# Altium PCB Circular PCB.PcbDoc (part 3 of 4)
Units mm, origin at the board's own origin, x right, y up, seen from the top; angles counter-clockwise.
Board outline 100 x 100 mm, 6 copper layers (Top Layer, GND (Top), X, Y, GND (Bot), Bottom Layer), stack 1.599 mm thick; 185 components, 119 nets, 581 pads, 159 vias.
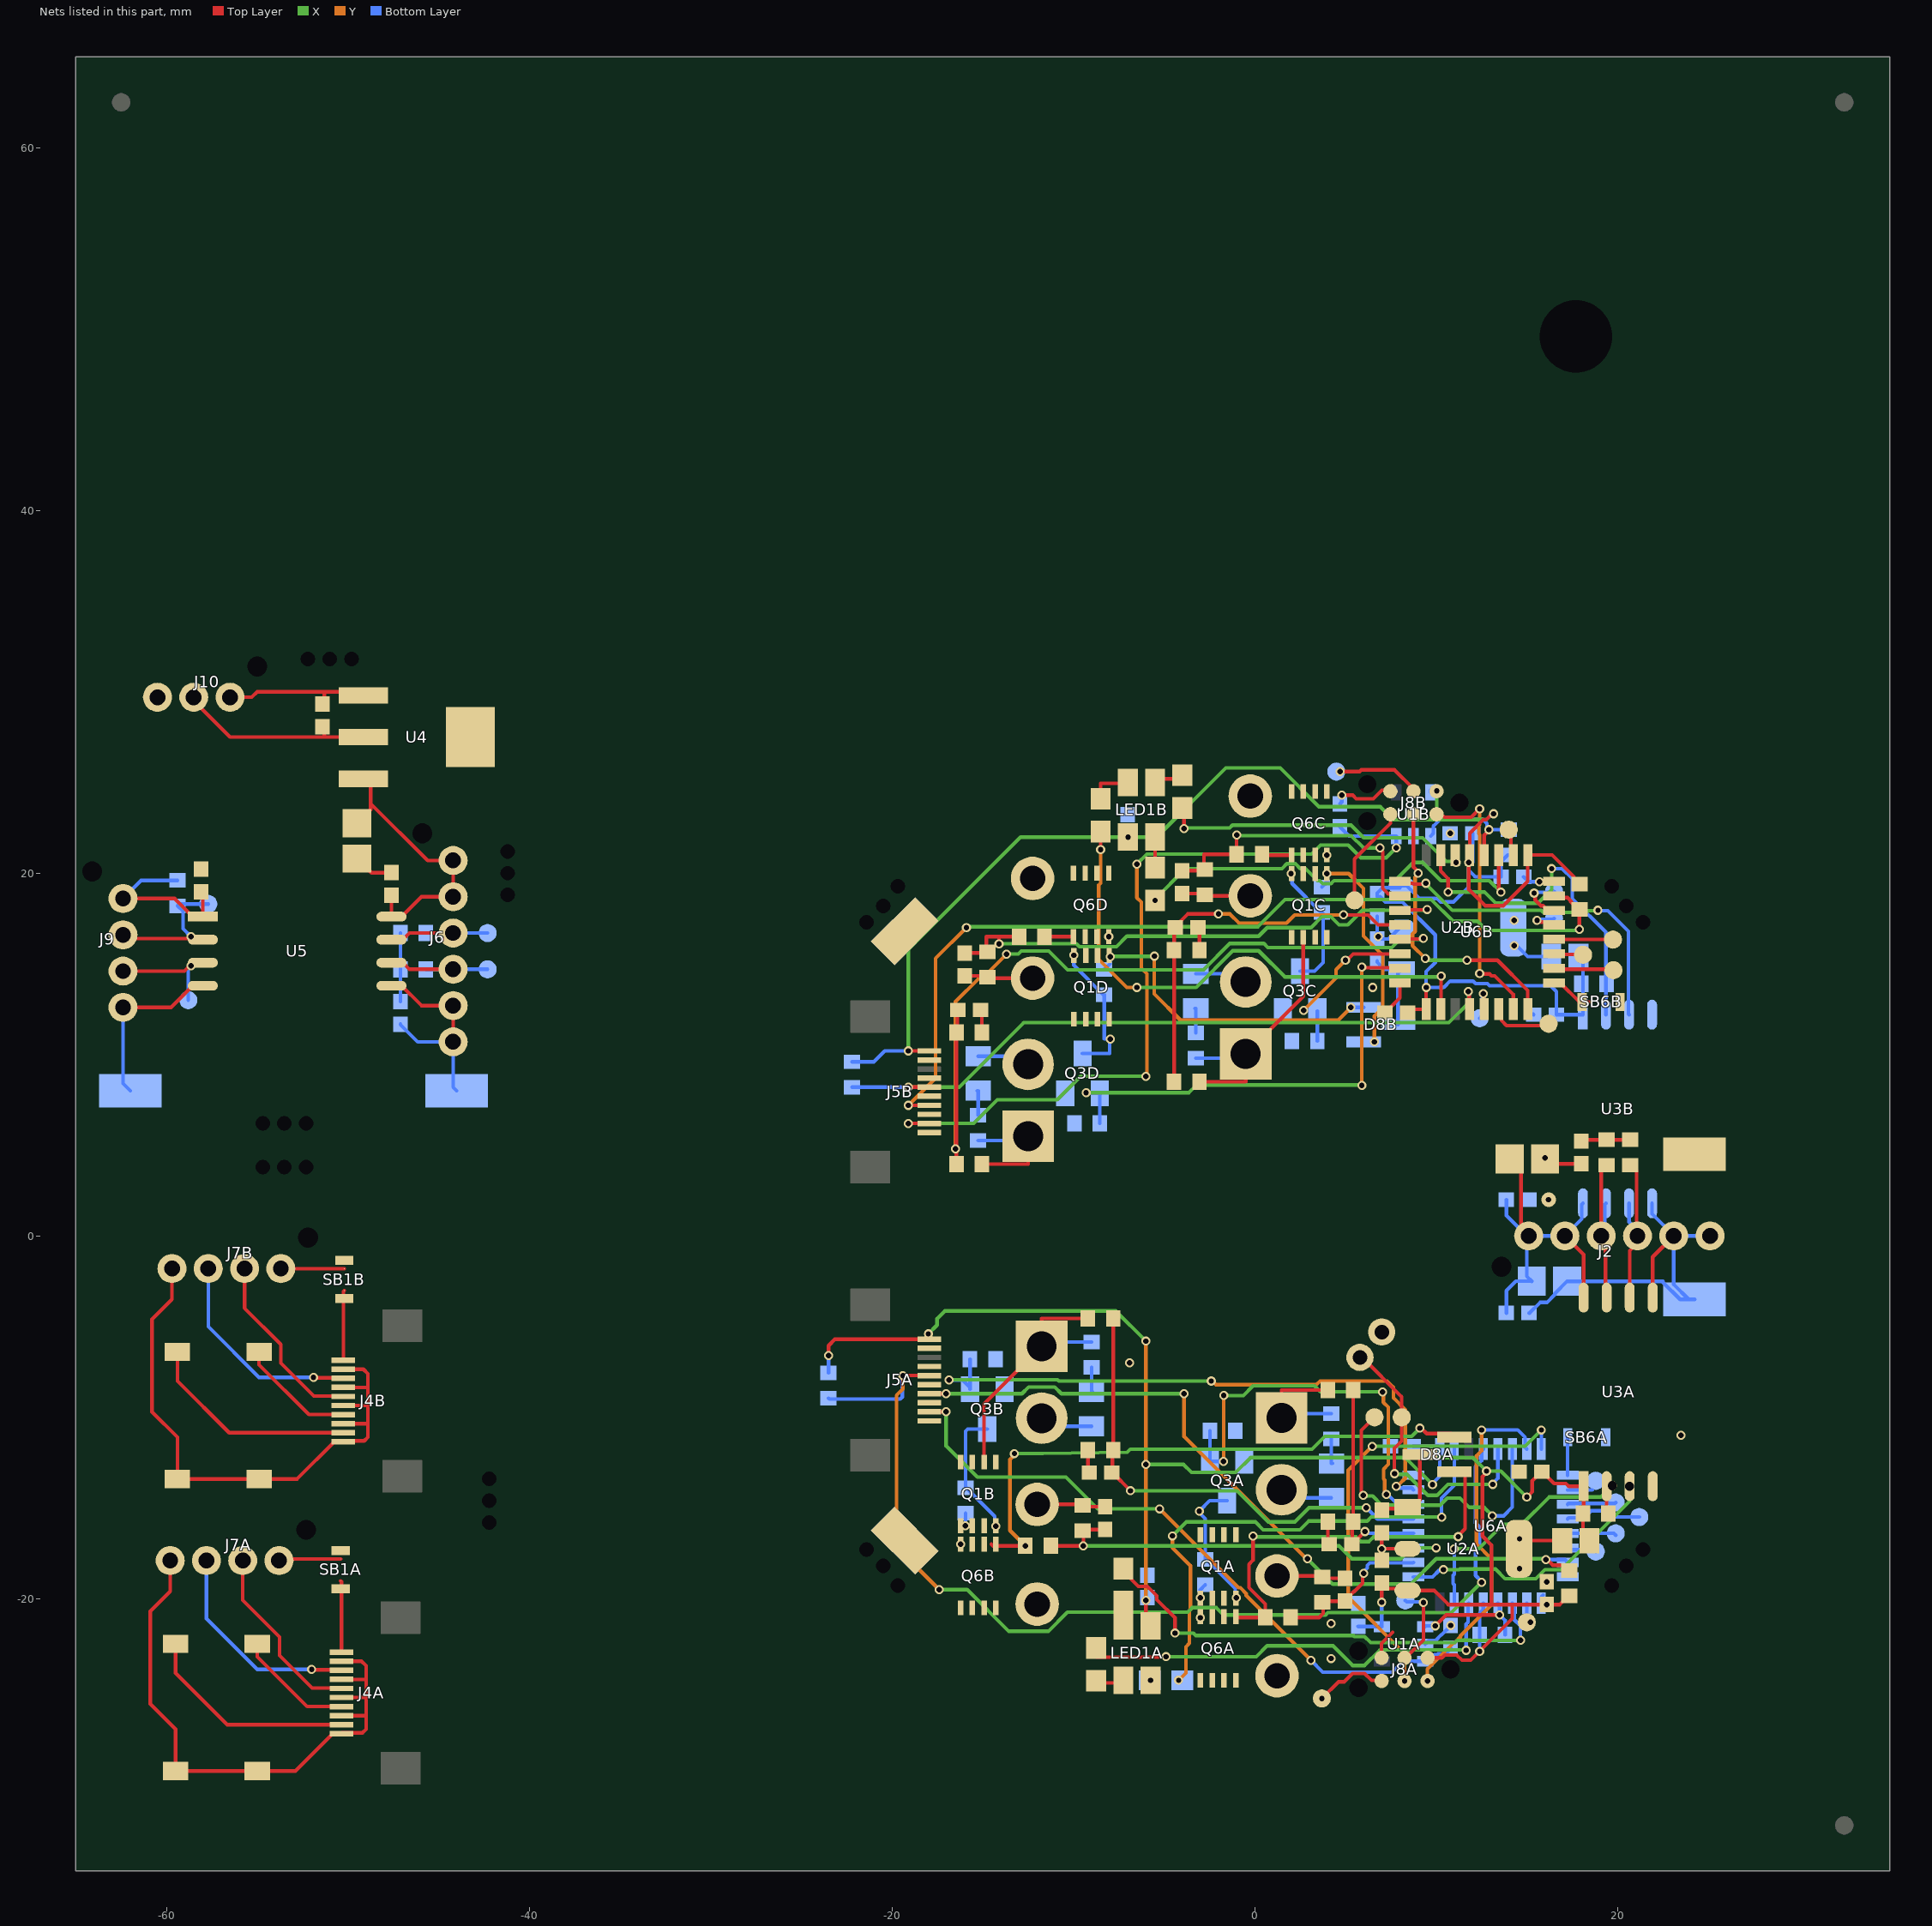
[diagram p6: the nets of this part, all layers, seen from the top]

## Via types
v1: diameter 0.5, hole 0.3, Top Layer to Bottom Layer, tented both sides, 155 vias
v2: diameter 0.5, hole 0.5, Top Layer to Bottom Layer, tented both sides, 2 vias
v3: diameter 0.8, hole 0.3, Top Layer to Bottom Layer, tented both sides, 2 vias

## Nets (pads, with @x,y where several pads share a name; then routed paths per layer and width w, separated by ;. In a path a pad name is that pad's centre, name@x,y a point inside that pad or via, vN(x,y) a via of type N, cw(c..) or ccw(c..) an arc to the next point about the centre after c; other vN are vias at no path point) (continued)
USART2_RXA: (continued)
  Bottom Layer w0.2: R37A.1@-23.5,-8.95 -23.45,-9 -19.55,-9 -19.433,-8.883 -19.433,-7.733 v1(-19.4,-7.7) ; v1(12.5,-19.1) 12.5,-19.046 12.176,-18.722 12.176,-17.179 12.4,-16.956 12.4,-16.044 12.176,-15.821 12.176,-12.719 12.5,-12.395 12.5,-11.85 U6A.20@12.6,-11.75
USART2_RXB: J5B.5 R37B.1 U6B.20 | length 38.7
  Top Layer w0.2: v1(-19.1,8.2) J5B.5@-17.95,8.2 ; v1(11.779,13.473) 11.815,13.437 11.815,12.535 U6B.20@11.85,12.5
  X w0.2: v1(-19.1,8.2) -16.3,8.2 -12.738,11.762 -5.738,11.762 10.7,11.762 11.8,12.862 11.8,13.452 v1(11.779,13.473)
  Bottom Layer w0.2: R37B.1@-22.2,8.2 v1(-19.1,8.2)